# Altium PCB MachXO2FPGA.PcbDoc
Units mil, origin at the board's own origin, x right, y up, seen from the top; angles counter-clockwise.
Board outline 1950 x 850 mil, 4 copper layers (Top Layer, Layer 1, Layer 2, Bottom Layer), stack 61.811 mil thick; 38 components, 38 nets, 173 pads, 65 vias.
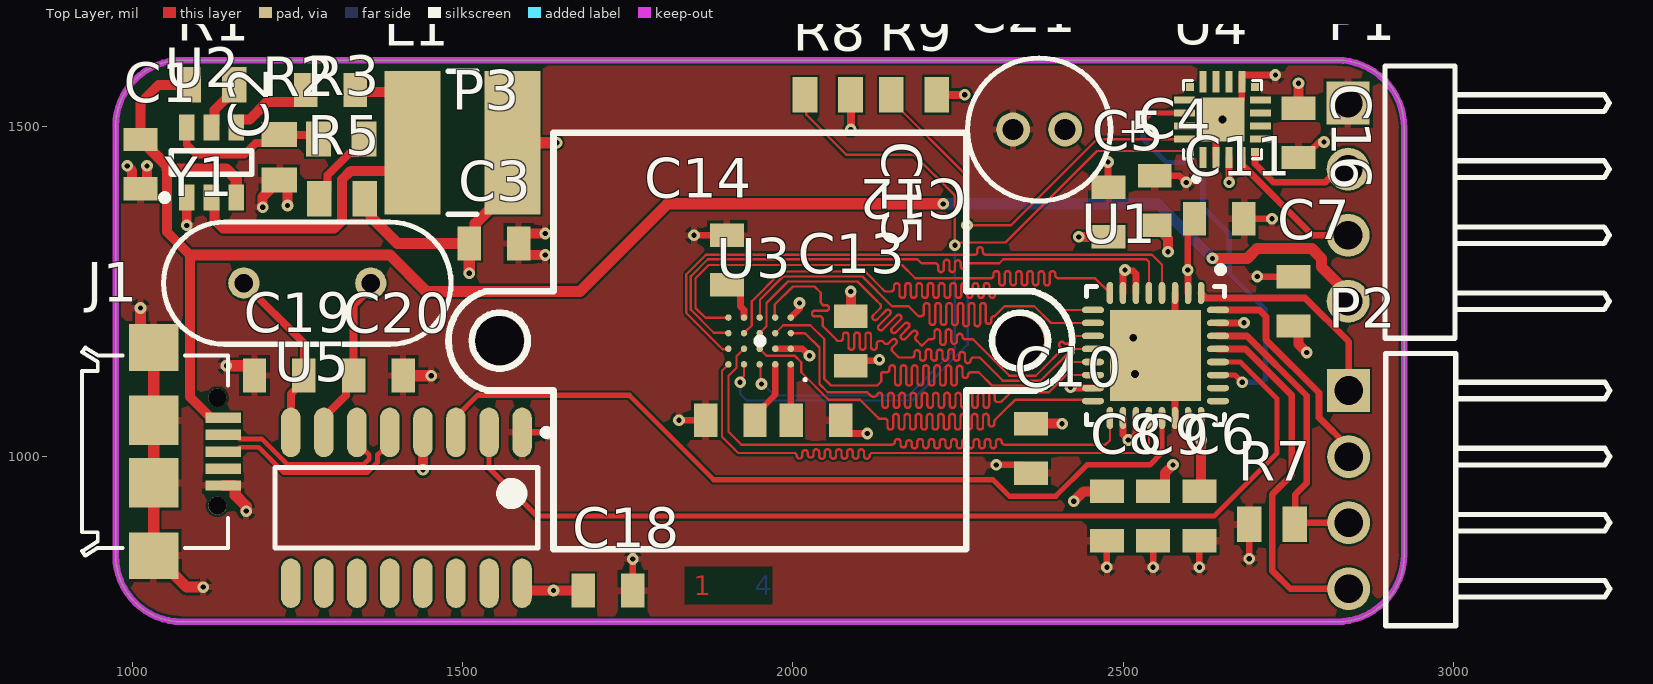
[diagram p0: Top Layer view]
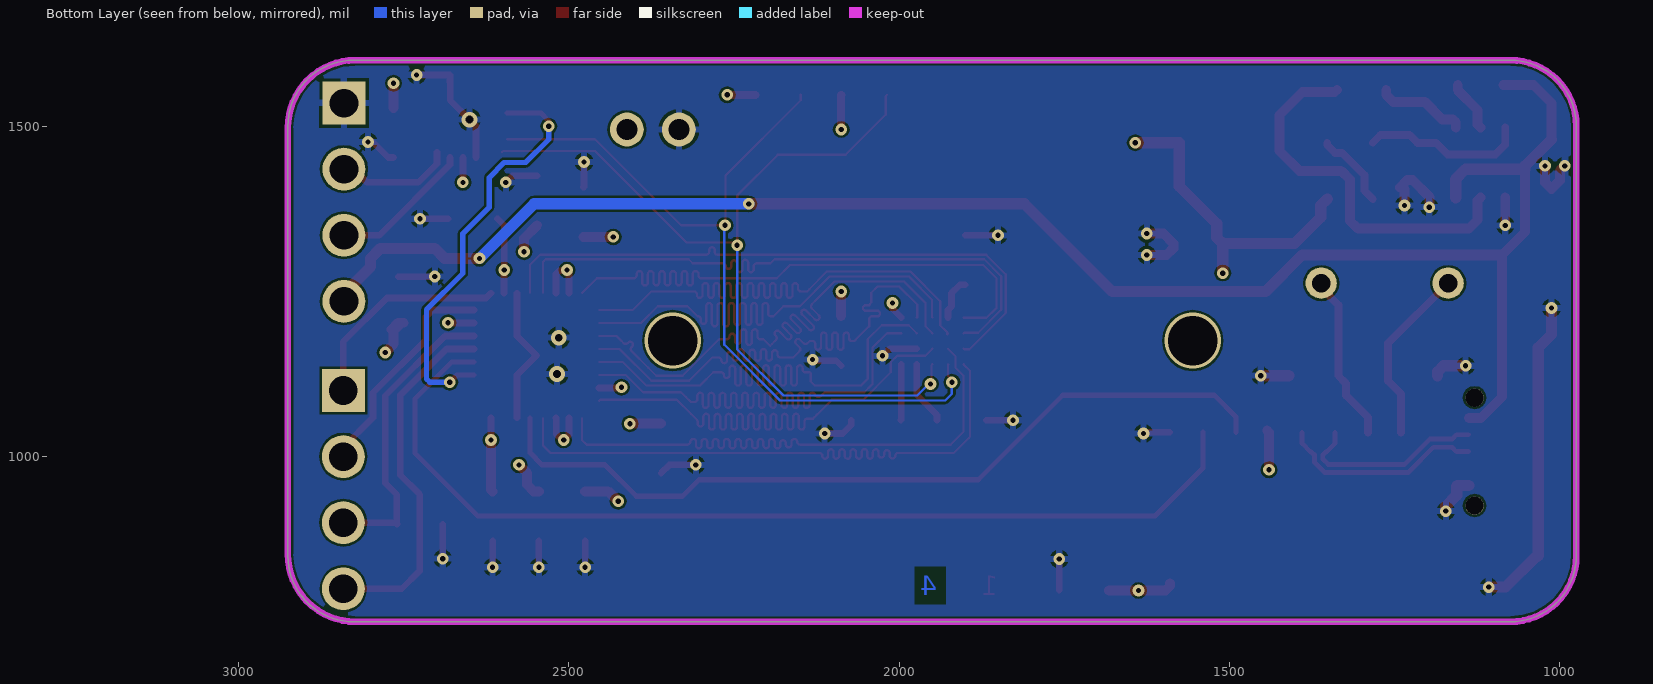
[diagram p1: Bottom Layer view, seen from below]
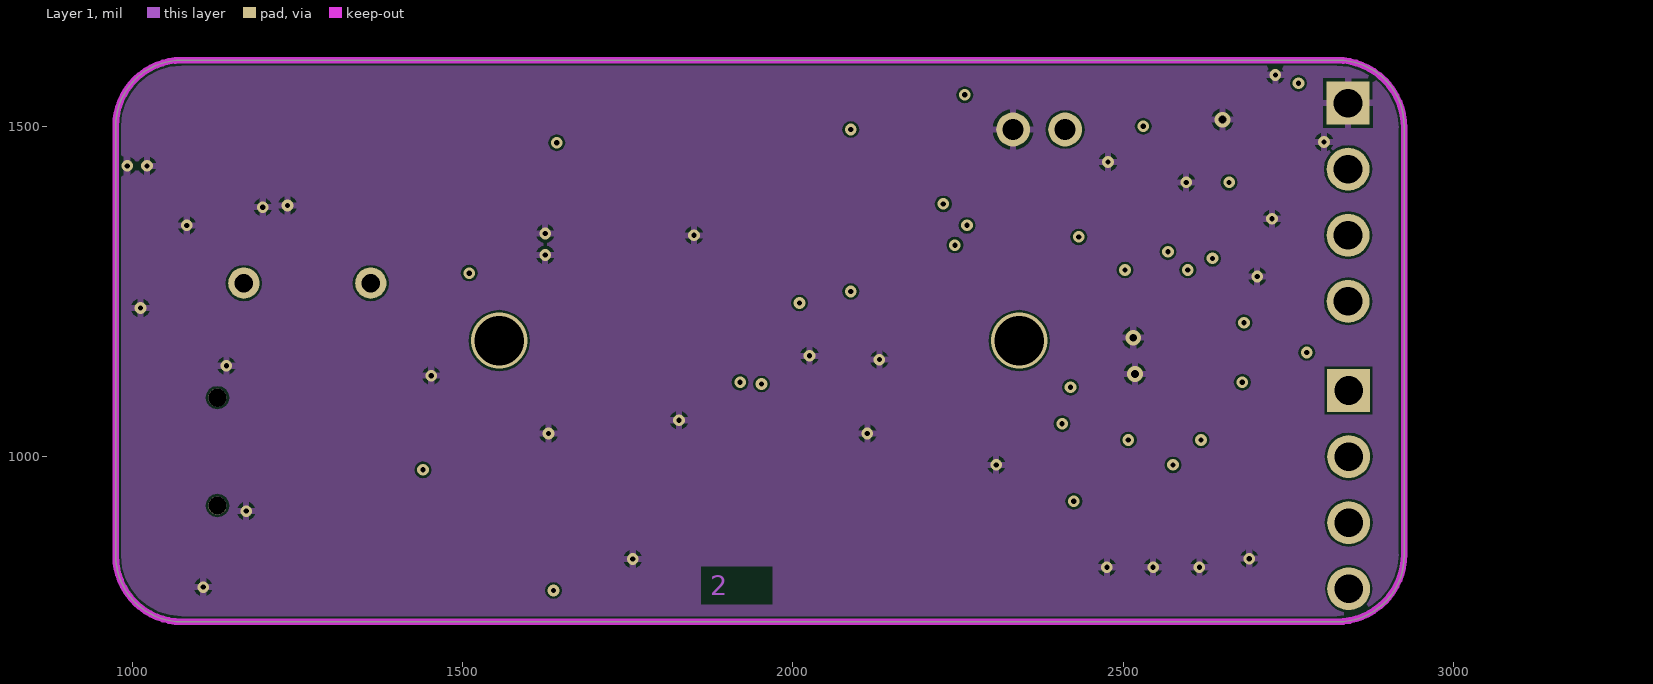
[diagram p2: Layer 1]
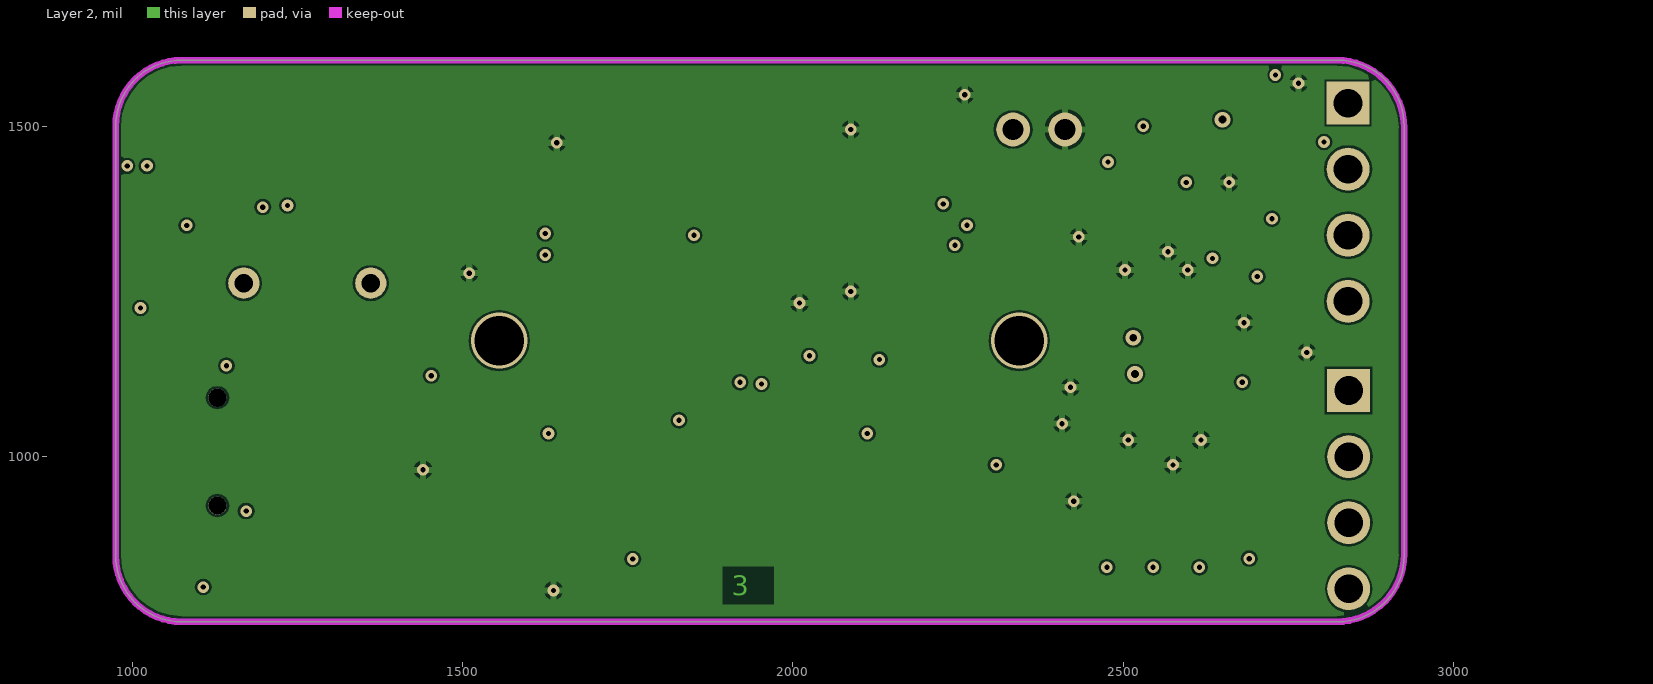
[diagram p3: Layer 2]
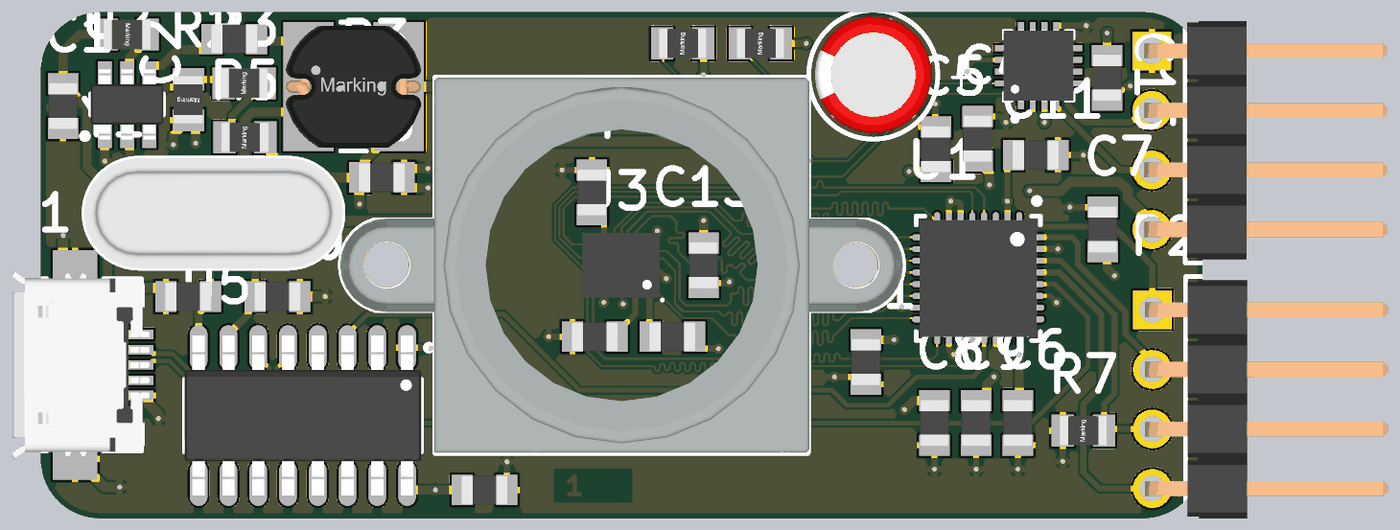
[diagram p4: 3D render of the assembled board from above, using the file's embedded part models]

## Layer stack, top to bottom
Top Solder: solder mask 1.378, Solder Resist, Dk 3.5
Top Layer: signal copper 1.378
Dielectric 2: prepreg 7.874, PP-006, Dk 4.6
Layer 1: signal copper 0.689
Dielectric 1: dielectric 41.9291, FR-4, Dk 4.8
Layer 2: signal copper 0.689
Dielectric 3: prepreg 7.874, PP-006, Dk 4.6
Bottom Layer: signal copper 1.378
Bottom Solder: solder mask 1.378, Solder Resist, Dk 3.5

## Board outline
2825,750 ccw(c2825,850) 2925,850 2925,1500 ccw(c2825,1500) 2825,1600 1075,1600 ccw(c1075,1500) 975,1500 975,850 ccw(c1075,850) 1075,750

## Design rules (kind name [scope] priority, off if disabled: settings)
Clearance [All] p1: gap=3.5 ignorepadtopadclearanceinfootprint=FALSE
DiffPairsRouting "Schematic Differential Pairs Routing_13" [InNetClass('USB')] p1: maxlimit=50 minlimit=3.5 mostfreqgap=5 toplayer_minwidth=3.5 toplayer_maxwidth=12 toplayer_prefwidth=7.35 midlayer1_minwidth=3.5 midlayer1_maxwidth=12 midlayer1_prefwidth=5.33 midlayer2_minwidth=3.5 midlayer2_maxwidth=12 midlayer2_prefwidth=5.33 bottomlayer_minwidth=3.5 bottomlayer_maxwidth=12 bottomlayer_prefwidth=7.35 impedanceprofiledriven=TRUE impedanceprofileid={5C0098F1-C063-4BAE-B721-2CA71FEA3CD5} impedanceprofilevalue=90.000000 maxuncoupledlength=500
DiffPairsRouting "Schematic Differential Pairs Routing" [InNetClass('IMG_SENS')] p2: maxlimit=50 minlimit=3.5 mostfreqgap=3.5 toplayer_minwidth=3.5 toplayer_maxwidth=12 toplayer_prefwidth=3.5 midlayer1_minwidth=3.5 midlayer1_maxwidth=12 midlayer1_prefwidth=3.5 midlayer2_minwidth=3.5 midlayer2_maxwidth=12 midlayer2_prefwidth=3.5 bottomlayer_minwidth=3.5 bottomlayer_maxwidth=12 bottomlayer_prefwidth=3.5 maxuncoupledlength=500
DiffPairsRouting "Schematic Differential Pairs Routing_12" [InNet('D3')] p3: maxlimit=50 minlimit=5 mostfreqgap=10 toplayer_prefgap=5 toplayer_minwidth=5 toplayer_maxwidth=12 toplayer_prefwidth=5 midlayer1_mingap=10 midlayer1_maxgap=10 midlayer1_minwidth=15 midlayer1_maxwidth=15 midlayer1_prefwidth=15 midlayer2_mingap=10 midlayer2_maxgap=10 midlayer2_minwidth=15 midlayer2_maxwidth=15 midlayer2_prefwidth=15 bottomlayer_prefgap=5 bottomlayer_minwidth=5 bottomlayer_maxwidth=12 bottomlayer_prefwidth=5 maxuncoupledlength=500
DiffPairsRouting "Schematic Differential Pairs Routing_11" [InNet('D0')] p4: maxlimit=50 minlimit=5 mostfreqgap=10 toplayer_prefgap=5 toplayer_minwidth=5 toplayer_maxwidth=12 toplayer_prefwidth=5 midlayer1_mingap=10 midlayer1_maxgap=10 midlayer1_minwidth=15 midlayer1_maxwidth=15 midlayer1_prefwidth=15 midlayer2_mingap=10 midlayer2_maxgap=10 midlayer2_minwidth=15 midlayer2_maxwidth=15 midlayer2_prefwidth=15 bottomlayer_prefgap=5 bottomlayer_minwidth=5 bottomlayer_maxwidth=12 bottomlayer_prefwidth=5 maxuncoupledlength=500
DiffPairsRouting "Schematic Differential Pairs Routing_10" [InNet('D5')] p5: maxlimit=50 minlimit=5 mostfreqgap=10 toplayer_prefgap=5 toplayer_minwidth=5 toplayer_maxwidth=12 toplayer_prefwidth=5 midlayer1_mingap=10 midlayer1_maxgap=10 midlayer1_minwidth=15 midlayer1_maxwidth=15 midlayer1_prefwidth=15 midlayer2_mingap=10 midlayer2_maxgap=10 midlayer2_minwidth=15 midlayer2_maxwidth=15 midlayer2_prefwidth=15 bottomlayer_prefgap=5 bottomlayer_minwidth=5 bottomlayer_maxwidth=12 bottomlayer_prefwidth=5 maxuncoupledlength=500
DiffPairsRouting "Schematic Differential Pairs Routing_9" [InNet('D2')] p6: maxlimit=50 minlimit=5 mostfreqgap=10 toplayer_prefgap=5 toplayer_minwidth=5 toplayer_maxwidth=12 toplayer_prefwidth=5 midlayer1_mingap=10 midlayer1_maxgap=10 midlayer1_minwidth=15 midlayer1_maxwidth=15 midlayer1_prefwidth=15 midlayer2_mingap=10 midlayer2_maxgap=10 midlayer2_minwidth=15 midlayer2_maxwidth=15 midlayer2_prefwidth=15 bottomlayer_prefgap=5 bottomlayer_minwidth=5 bottomlayer_maxwidth=12 bottomlayer_prefwidth=5 maxuncoupledlength=500
DiffPairsRouting [All] p7: maxlimit=10 minlimit=10 mostfreqgap=10 toplayer_minwidth=15 toplayer_maxwidth=15 toplayer_prefwidth=15 midlayer1_minwidth=15 midlayer1_maxwidth=15 midlayer1_prefwidth=15 midlayer2_minwidth=15 midlayer2_maxwidth=15 midlayer2_prefwidth=15 bottomlayer_minwidth=15 bottomlayer_maxwidth=15 bottomlayer_prefwidth=15 maxuncoupledlength=500
MatchedLengths USB [InNetClass('USB')] p1: tolerance=10 checknetsindiffpair=FALSE checkdiffpairvsdiffpair=TRUE checkxsignals=TRUE checkothers=TRUE
MatchedLengths IMG_SENS [InNetClass('IMG_SENS')] p2: tolerance=10 checknetsindiffpair=FALSE checkdiffpairvsdiffpair=TRUE checkxsignals=TRUE checkothers=TRUE
PlaneClearance [All] p1: clearance=3.5
PlaneConnect [All] p1: planeconnectstyle=Direct reliefexpansion=20 reliefentries=4 reliefconductorwidth=10 reliefairgap=10
PolygonConnect [All] p1: connectstyle=Relief reliefconductorwidth=10 reliefentries=4 polygonreliefangle="90 Angle" airgapwidth=5
RoutingVias [All] p1: holewidth=7.87 width=0.45 viastyle="Through Hole" minholewidth=7.87 minwidth=17.72 maxholewidth=196.85 maxwidth=393.7
SolderMaskExpansion [All] p1: expansion=4 istentingtop=FALSE
Width [All] p1: maxlimit=17 minlimit=3.5 preferedwidth=3.5
27 further rules are at their usual default settings.

## Classes and differential pairs
net class USB: D_N D_P
net class IMG_SENS: D0 D1 D2 D3 D4 D5 D6 D7 HSYNC IN_CLK PCLK VSYNC
differential pair D: +D_P -D_N

## Components (designator, comment, footprint, x,y, rotation, side; value= is the part's Value field where it differs from the comment)
C1 "22uF" WCAP-CSGP_0805_H=0.8mm_Reflow 1012.5,1442.5 r90 top
C2 "100nF" WCAP-CSGP_0805_H=0.8mm_Reflow 1300,1555 r180 top
C3 "22uF" WCAP-CSGP_0805_H=0.8mm_Reflow 1547.5,1322.5 r0 top
C4 "100nF" WCAP-CSGP_0805_H=0.8mm_Reflow 2547.5,1387.5 r90 top
C5 "100nF" WCAP-CSGP_0805_H=0.8mm_Reflow 2477.5,1370 r90 top
C6 "100nF" WCAP-CSGP_0805_H=0.8mm_Reflow 2615,910 r270 top
C7 "100nF" WCAP-CSGP_0805_H=0.8mm_Reflow 2757.5,1235 r90 top
C8 "100nF" WCAP-CSGP_0805_H=0.8mm_Reflow 2475,910 r270 top
C9 "100nF" WCAP-CSGP_0805_H=0.8mm_Reflow 2545,910 r270 top
C10 "100nF" WCAP-CSGP_0805_H=0.8mm_Reflow 2360,1012.4 r270 top
C11 "100nF" WCAP-CSGP_0805_H=0.8mm_Reflow 2645,1360 r0 top
C12 "100uF" WCAP-CSGP_0805_H=0.8mm_Reflow 2087.5,1175 r270 top
C13 "100uF" WCAP-CSGP_0805_H=0.8mm_Reflow 2035,1055 r0 top
C14 "100uF" WCAP-CSGP_0805_H=0.8mm_Reflow 1900,1297.5 r90 top
C15 "100uF" WCAP-CSGP_0805_H=0.8mm_Reflow 1905.1,1055 r180 top
C16 "100uF" WCAP-CSGP_0805_H=0.8mm_Reflow 2765,1490 r270 top
C18 "100nF" WCAP-CSGP_0805_H=0.8mm_Reflow 1720,797.5 r180 top
C19 "15pF" WCAP-CSGP_0805_H=0.6mm_Reflow 1222.5,1122.5 r0 top
C20 "15pF" WCAP-CSGP_0805_H=0.6mm_Reflow 1372.5,1122.5 r0 top
C21 "1uF, 50V" WCAP-ATG8_5x11 2372.5,1495 r0 top
J1 "Micro USB 2.0 Type B Receptacle" 629105136821 1032.5,1007.5 r270 top
L1 "3.3uH, CD54" WE-PD2_5848 1500,1475 r0 top
P1 "" 61300411021 2949.06,1385 r90 top
P2 "" 61300411021 2950,950 r90 top
P3 "M12 lens mount" PCBComponent_1 1950,1175 r180 top
R1 "100k" WRIS-PSMB_0805_H=0.22mm 1120,1562.5 r180 top
R2 "15k" WRIS-PSMB_0805_H=0.22mm 1222.77,1452.99 r90 top
R3 "36.5k" WRIS-PSMB_0805_H=0.22mm 1316.41,1480.57 r0 top
R5 "1k" WRIS-PSMB_0805_H=0.22mm 1317.5,1390 r0 top
R7 "4.7k" WRIS-PSMB_0805_H=0.22mm 2725,897.5 r0 top
R8 "4.7k" WRIS-PSMB_0805_H=0.22mm 2052.5,1547.5 r0 top
R9 "4.7k" WRIS-PSMB_0805_H=0.22mm 2183.05,1547.5 r0 top
U1 "MachXO2_1200HC_6SG32C" QFN50P500X500X65_HS-33N 2548.6,1153.01 r270 top
U2 "JW5033S" SOT95P280X110-6N 1120,1445 r90 top
U3 "GC0307" BGA20C60P5X4_329X276X78 1949.5,1175 r180 top
U4 "EFM8BB1x-QFN20" *QFN50P300X300X80-21N 2650,1510 r90 top
U5 "CH340G" CH340G 1415,922.5 r270 top
Y1 "12MHz" WE-XTAL_HC49/4H 1265,1262.5 r0 top

## Footprints (in the part's own frame and the unit in brackets; to place one, negate y for a bottom-side part, rotate by r counter-clockwise, add the part's x,y. Pads: shape width x height; smd on the part's side, far side on the other; paste and mask are expansions set on the pad)
61300411021 [mm] "Pin Header, pitch 2.54 mm, THT, Angled, single row, 4p"
  rect 1.65x1.65 hole 1.1: 1(3.81,2.77)
  round 1.65 hole 1.1: 2(1.27,2.77) 3(-1.27,2.77) 4(-3.81,2.77)
  silkscreen extent -5.23,-7.27 5.23,1.35, body extent -5.08,-7.27 5.08,3.09, height 2.58
629105136821 [mm] "Micro USB 2.0 SMT Type B Horizontal 5 Contacts"
  rect 0.4x1.35 smd: 1(-1.3,2.675) 2(-0.65,2.675) 3(0,2.675) 4(0.65,2.675) 5(1.3,2.675)
  round 0.7 hole 0.7 unplated: MH1(-2.075,2.45) MH2(2.075,2.45)
  rect 1.8x1.9 smd: S1(-4,0) S4(4,0)
  rect 1.9x1.9 smd: S2(-1.2,0) S3(1.2,0)
  silkscreen extent -4,-2.75 4,2.85, body extent -4,-2.73 4,3.17, height 2.69
*QFN50P300X300X80-21N [mm]
  rect 0.3x0.3 smd: 1(-1.25,1.25) 6(-1.25,-1.25) 11(1.25,-1.25) 16(1.25,1.25)
  rect 0.81x0.26 smd: 2(-1.455,0.75) 3(-1.455,0.25) 4(-1.455,-0.25) 5(-1.455,-0.75) 12(1.455,-0.75) 13(1.455,-0.25) 14(1.455,0.25) 15(1.455,0.75)
  rect 0.26x0.81 smd: 7(-0.75,-1.455) 8(-0.25,-1.455) 9(0.25,-1.455) 10(0.75,-1.455) 17(0.75,1.455) 18(0.25,1.455) 19(-0.25,1.455) 20(-0.75,1.455)
  rect 1.7x1.7 smd: 21(0,0)
  silkscreen extent -2.37,-1.5 1.5,1.5, body extent -1.52,-1.52 1.52,1.52, height 0.7
BGA20C60P5X4_329X276X78 [mm] "BGA, 20-Leads, Body 3,29x2,76mmx0,78mm, Pitch 0,60mm"
  round 0.25 smd: A1(-1.2,0.9) A2(-0.6,0.9) A3(0,0.9) A4(0.6,0.9) A5(1.2,0.9) B1(-1.2,0.3) B2(-0.6,0.3) B3(0,0.3) B4(0.6,0.3) B5(1.2,0.3) C1(-1.2,-0.3) C2(-0.6,-0.3) C3(0,-0.3) C4(0.6,-0.3) C5(1.2,-0.3) D1(-1.2,-0.9) D2(-0.6,-0.9) D3(0,-0.9) D4(0.6,-0.9) D5(1.2,-0.9)
  silkscreen extent -1.8,1.44 -1.7,1.53, body extent -1.65,-1.38 1.65,1.38, height 0.77
CH340G [mm] "TSOP, 16-Leads, Body 10,06x3,90mm, Pitch 1,27mm, IPC Medium Density"
  oval 1.9x0.75 smd: 1(-2.9,4.445) 2(-2.9,3.175) 3(-2.9,1.905) 4(-2.9,0.635) 5(-2.9,-0.635) 6(-2.9,-1.905) 7(-2.9,-3.175) 8(-2.9,-4.445) 9(2.9,-4.445) 10(2.9,-3.175) 11(2.9,-1.905) 12(2.9,-0.635) 13(2.9,0.635) 14(2.9,1.905) 15(2.9,3.175) 16(2.9,4.445)
  silkscreen extent -3.02,-5.05 1.55,5.5, body extent -3.41,-5.05 3.41,5.05, height 1.6
PCBComponent_1 [mil]
  silkscreen extent -473,-315 471,315, body extent -472,-315 472,315, height 583
QFN50P500X500X65_HS-33N [mm] "QFN, 32-Leads, Body 5,00x5,00mm, Pitch 0,50mm, Thermal Pad 3,50x3,50mm, IPC Medium Density"
  oval 0.85x0.25 smd: 1(-2.4,1.75) 2(-2.4,1.25) 3(-2.4,0.75) 4(-2.4,0.25) 5(-2.4,-0.25) 6(-2.4,-0.75) 7(-2.4,-1.25) 8(-2.4,-1.75) 17(2.4,-1.75) 18(2.4,-1.25) 19(2.4,-0.75) 20(2.4,-0.25) 21(2.4,0.25) 22(2.4,0.75) 23(2.4,1.25) 24(2.4,1.75)
  oval 0.25x0.85 smd: 9(-1.75,-2.4) 10(-1.25,-2.4) 11(-0.75,-2.4) 12(-0.25,-2.4) 13(0.25,-2.4) 14(0.75,-2.4) 15(1.25,-2.4) 16(1.75,-2.4) 25(1.75,2.4) 26(1.25,2.4) 27(0.75,2.4) 28(0.25,2.4) 29(-0.25,2.4) 30(-0.75,2.4) 31(-1.25,2.4) 32(-1.75,2.4)
  rect 3.5x3.5 smd: 33(0,0)
  silkscreen extent -3.42,-2.65 2.65,2.65, body extent -2.52,-2.52 2.52,2.52, height 0.65
SOT95P280X110-6N [mm] "SOT23, 6-Leads, Body 2,90x2,80mm, Pitch 0,95mm, IPC Medium Density"
  rect 1x0.6 smd: 1(-1.35,0.95) 2(-1.35,0) 3(-1.35,-0.95) 4(1.35,-0.95) 5(1.35,0) 6(1.35,0.95)
  silkscreen extent -1.47,-1.55 0.45,1.92, body extent -1.5,-1.55 1.5,1.55, height 1.1
WCAP-ATG8_5x11 [mm] "Aluminum Electrolytic Capacitors, 5x11mm"
  round 1.3 hole 0.8: 1(-1,0) 2(1,0)
  silkscreen extent -2.75,-2.75 2.75,2.75, body extent -2.49,-2.5 2.5,2.5, height 11.31
WCAP-CSGP_0805_H=0.6mm_Reflow [mm] "Ceramic Capacitors, body 2x1.25mm"
  rect 0.9x1.3 smd: 1(-0.95,0) 2(0.95,0)
  body extent -1,-0.62 1,0.63, height 0.6
WCAP-CSGP_0805_H=0.8mm_Reflow [mm] "Ceramic Capacitors, body 2x1.25mm"
  rect 0.9x1.3 smd: 1(-0.95,0) 2(0.95,0)
  body extent -1,-0.62 1,0.63, height 0.8
WE-PD2_5848 [mm] "SMD Power Inductor, 2-Leads, body 5.8x5.2mm"
  rect 2.15x5.5 smd: 1(-1.925,0) 2(1.925,0)
  silkscreen extent -0.55,-2.75 0.55,2.75, body extent -2.9,-2.6 2.89,2.6, height 4.48
WE-XTAL_HC49/4H [mm] "Quartz Crystal, size HC49/4H, body 11.05x4.7mm"
  round 1.2 hole 0.7: 1(-2.44,0) 2(2.44,0)
  silkscreen extent -5.52,-2.35 5.52,2.35, body extent -5.52,-2.35 5.53,2.35, height 4.15
WRIS-PSMB_0805_H=0.22mm [mm] "Metal Plate Resistor, SMT, body size 2x1.25mm"
  rect 0.95x1.36 smd: 1(-0.875,0) 2(0.875,0)
  body extent -1,-0.62 1,0.63, height 0.22

## Part data
C1 C3 C12 C13 C14 C15 C16: library part 885012207016, "WCAP-CSGP General Purpose Ceramic Capacitors, size 0805, 100nF, +/-10%, 10VDC", Capacitance=100nF, Capacitance Tolerance=+/-10%, Isolation Resistance=>=5GOhm, Operating Temperature="-55 to +125degC", Rated Voltage=10VDC, Ceramic Type=X7R, ComponentLink1Description=Manufacturer, ComponentLink1URL=http://www.we-online.de, ComponentLink2Description=Datasheet, ComponentLink2URL=https://katalog.we-online.com/pbs/datasheet/885012207016.pdf, Dissipation Factor=#NAME?, Height="0.8mm +/-0.10mm", Mounting Technology=SMD, Packaging="Tape and Reel", Part Number=885012207016, Published Date="August 2019", Publisher="Wurth Elektronik", Size=0805, Technical Reference=X7R0805104K010DFCT10000
C2 C4 C5 C6 C7 C8 C9 C10 C11 C18: library part 885012207016, "WCAP-CSGP General Purpose Ceramic Capacitors, size 0805, 100nF, +/-10%, 10VDC", Capacitance Tolerance=+/-10%, Isolation Resistance=>=5GOhm, Operating Temperature="-55 to +125degC", Rated Voltage=10VDC, Capacitance=100nF, Ceramic Type=X7R, ComponentLink1Description=Manufacturer, ComponentLink1URL=http://www.we-online.de, ComponentLink2Description=Datasheet, ComponentLink2URL=https://katalog.we-online.com/pbs/datasheet/885012207016.pdf, Dissipation Factor=#NAME?, Height="0.8mm +/-0.10mm", Mounting Technology=SMD, Packaging="Tape and Reel", Part Number=885012207016, Published Date="August 2019", Publisher="Wurth Elektronik", Size=0805, Technical Reference=X7R0805104K010DFCT10000
C19 C20: library part 885012007001, "WCAP-CSGP General Purpose Ceramic Capacitors, size 0805, 15pF, +/-5%, 10VDC", Capacitance Tolerance=+/-5%, Isolation Resistance=>=10GOhm, Operating Temperature="-55 to +125degC", Rated Voltage=10VDC, Capacitance=15pF, Ceramic Type=NP0, ComponentLink1Description=Manufacturer, ComponentLink1URL=http://www.we-online.de, ComponentLink2Description=Datasheet, ComponentLink2URL=https://katalog.we-online.com/pbs/datasheet/885012007001.pdf, Dissipation Factor=Q>=400+20C, Height="0.6mm +/-0.10mm", Mounting Technology=SMD, Packaging="Tape and Reel", Part Number=885012007001, Published Date="August 2019", Publisher="Wurth Elektronik", Size=0805, Technical Reference=NP00805150J010DFCT10000
C21: library part 860010672005, "WCAP-ATG8 THT Aluminum Electrolytic Capacitors, D5mm x L11mm, 1uF, +/-20%, 50VDC", Capacitance=1uF, Capacitance Tolerance=+/-20%, Leakage Current=3uA, Operating Temperature="-40 to +85degC", Rated Voltage=50VDC, Ripple Current max.=17mA, ComponentLink1Description=Manufacturer, ComponentLink1URL=http://www.we-online.de, ComponentLink2Description=Datasheet, ComponentLink2URL=https://katalog.we-online.com/pbs/datasheet/860010672005.pdf, Diameter=5mm, Dissipation Factor=10%, Endurance=2000h, Length=11mm, Mounting Technology=THT, Packaging="Ammo Pack", Part Number=860010672005, Published Date="August 2019", Publisher="Wurth Elektronik", Technical Reference=ATBC110010M050DSPA3B000
J1: library part 629105136821, "Micro USB 2.0 Type B, Receptacle, Horizontal, SMT", Operating Temperature="-40 to +105degC", Rated Current=1A, Working Voltage=30VAC, Application="Micro USB 2.0", ComponentLink1Description=Manufacturer, ComponentLink1URL=http://www.we-online.de, ComponentLink2Description=Datasheet, ComponentLink2URL=https://katalog.we-online.com/em/datasheet/629105136821.pdf, Gender=Receptacle, Interface Type="Type B", Mounting Technology=SMT, Packaging="Tape and Reel", Part Number=629105136821, Pin Number=5, Published Date="September 2019", Publisher="Wurth Elektronik", Type=Horizontal
L1: library part 744774022, "WE-PD2 SMT Power Inductor, size 5848, 2.2uH, 4.6A", DC Resistance max.=0.041Ohm, DC Resistance typ.=0.026Ohm, Inductance=2.2uH, Manufacturer="Wurth Elektronik", Operating Temperature="-40 to +125degC", Rated Current=4.6A, Saturation Current=8.2A, Self Resonant Frequency=54MHz, ComponentLink1Description=Manufacturer, ComponentLink1URL=http://www.we-online.de, ComponentLink2Description=Datasheet, ComponentLink2URL=https://www.we-online.com/catalog/datasheet/744774022.pdf, Manufacturer Part Number=744774022, Mounting Technology=SMT, Packaging="Tape and Reel", Published Date="April 2020", Size=5848
P1 P2: library part 61300411021, "WR-PHD Pin Header, THT, pitch 2.54mm, Single Row, Angled, 4p", Contact Resistance=20mOhm, Manufacturer="Wurth Elektronik", Operating Temperature="-40 to +105degC", Rated Current=3A, Withstanding Voltage=500VAC, Working Voltage=250VAC, ComponentLink1Description=Manufacturer, ComponentLink1URL=http://www.we-online.de, ComponentLink2Description=Datasheet, ComponentLink2URL=https://www.we-online.com/catalog/datasheet/61300411021.pdf, Gender="Pin Header", Manufacturer Part Number=61300411021, Mounting Technology=THT, Orientation=Angled, Packaging=Bag, Pin Number=4, Pitch=2.54mm, Published Date="May 2020", Row Number=Single
R1 R2 R3 R5 R7 R8 R9: library part 580060720008, "WRIS-PSMB Metal Plate Resistors, size 0805, 10mOhm, +/-1%, 0.5W", Operating Temperature="-55 to +155degC", Rated Current=7.07A, Rated Power=0.5W, Resistance=10mOhm, Resistance Tolerance=+/-1%, Temperature Coefficient of Resistance=+/-100ppm/degC, ComponentLink1Description=Manufacturer, ComponentLink1URL=http://www.we-online.de, ComponentLink2Description=Datasheet, ComponentLink2URL=https://katalog.we-online.com/pbs/datasheet/580060720008.pdf, Height=0.22mm, Length=2mm, Mounting Technology=SMT, Packaging="Tape and Reel", Part Number=580060720008, Published Date="September 2019", Publisher="Wurth Elektronik", Size=0805, Technical Reference=MB0805R010F102KAATP0000, Width=1.25mm
U2: "2A Step-Down Converter"
Y1: library part 830014948B, "WE-XTAL Quartz Crystal, size HC49 12MHz", Frequency=27.12MHz, Frequency Stability=50ppm, Frequency Tolerance=+/-30ppm, Load Capacitance=-, Operating Temperature="-10 up to +60degC", ComponentLink1Description=Manufacturer, ComponentLink1URL=http://www.we-online.de, ComponentLink2Description=Datasheet, ComponentLink2URL=https://katalog.we-online.com/pbs/datasheet/830014948B.pdf, Mounting Technology=THT, Packaging=Bulk, Part Number=830014948B, Published Date="March 2019", Publisher="Wurth Elektronik", Size=HC49-4H

## Via types
v1: diameter 17.72, hole 7.87, Top Layer to Bottom Layer, tented both sides, 60 vias
v2: diameter 23.62, hole 11.81, Top Layer to Bottom Layer, 3 vias
v3: diameter 85, hole 75, Top Layer to Bottom Layer, 2 vias

## Nets (pads, with @x,y where several pads share a name; then routed paths per layer and width w, separated by ;. In a path a pad name is that pad's centre, name@x,y a point inside that pad or via, vN(x,y) a via of type N, cw(c..) or ccw(c..) an arc to the next point about the centre after c; other vN are vias at no path point)
2V8: C3.1 C4.1 C5.1 C6.1 C7.1 C8.1 C9.1 C10.1 C11.1 C12.1 C16.1 C18.2 C21.2 L1.2 R5.2 R8.2 R9.2 U1.2 U1.6 U1.7 U1.15 U1.18 U1.19 U1.24 U1.31 U3.D1 U4.4 U5.4 U5.16 | length 1670.5
  Top Layer w10: U3.D1 2010,1223.69 v1(2010,1232.5) ; v1(2420,1105) 2421.12,1103.88 2454.04,1103.88 U1.15 ; U1.18 2499.39,1033.11 v1(2507.5,1025) 2509.59,1025 2517.09,1032.5 2517.5,1032.5 2519,1034 2519,1058.44 U1.19 ; U1.7 2499.39,1277.3 2503.11,1281.02 2514.69,1281.02 2519.07,1276.64 U1.6 ; U1.2 2597.82,1282.18 v1(2597.5,1282.5) 2597.5,1349.9 C11.1 ; v1(2617.5,1025) U1.24 ; U1.31 2682.22,1202.22 v1(2682.5,1202.5) ; U4.4 2659.84,1415.16 v1(2660,1415)
  Top Layer w12: R8.2 2087.5,1546.95 v1(2087.5,1495) ; R9.2 v1(2260,1547.5)
  Top Layer w15: v1(1440,980) U5.4 U5.4@1442.78,1039.45 ; U5.16 1590,804.21 1596.71,797.5 v1(1637.5,797.5) C18.2 ; C12.1 v1(2087.5,1250) ; C10.1 v1(2407.3,1049.8) ; v1(2425,932.5) 2440,947.5 2474.9,947.5 C8.1 ; v1(2432.5,1332.5) 2435,1332.5 2435.1,1332.6 C5.1 ; C9.1 2552.87,947.4 2563.09,957.62 2563.09,975.59 v1(2575,987.5) ; C4.1 2567.5,1330.1 v1(2567.5,1310) ; C6.1 2617.5,949.9 v1(2617.5,1025) ; C7.1@2750,1202.6 2757.87,1202.6 C7.1@2768.09,1192.38 ; C7.1 2765,1190.1 2765,1170 v1(2777.5,1157.5) ; C16.1 v1(2765,1565)
  Top Layer w17: R5.2 1361.91,1380.04 1361.91,1362.08 1401.49,1322.5 C3.1 ; v1(1510.1,1277.6) C3.1 ; v1(1642.5,1475) L1.2 1575.79,1409.06 1519.32,1352.58 1519.32,1331.72 C3.1
  Layer 2 w17: v1@1510,1277.5 v1(1510.1,1277.6)
  other v1: 2502.5,1282.5
5V: C1.2 J1.1 P1.4 R1.2 U2.3 | length 2676.3
  Top Layer w15: C1.2@1012.5,1480 1012.5,1535 1040,1562.5 R1.2 ; 1052.5,1435 1052.5,1340 1087.5,1305 1087.5,1090.3 1119.11,1058.68 J1.1
  Top Layer w17: C1.2@1012.5,1480 1052.5,1440 ; 1052.5,1435 1142.5,1435 1157.4,1420.1 U2.3 ; 1087.5,1305 1390,1305 1445,1250 1677.5,1250 1810,1382.5 v1(2227.5,1382.5) ; v1(2635,1300) 2687.5,1300 2702.5,1315 2785,1315 2800,1300 2800,1287 2840,1247 P1.4
  Bottom Layer w17: v1(2227.5,1382.5) 2552.5,1382.5 v1(2635,1300)
C2CK: P1.3 U4.5 | length 215.6
  Top Layer w10: U4.5 2679.53,1441.89 2786.42,1335 P1.3
C2D: P1.2 U4.6 | length 178.3
  Top Layer w10: U4.6 2699.21,1443.29 2727.5,1415 2805.13,1415 2825.13,1435 P1.2
D0: U1.13 U3.C2 | length 947.9
  Top Layer w3.5: U3.C2 1985.25,1198.94 2026.06,1198.94 2047.5,1177.5 2047.5,1117.5 2057.5,1107.5 2127.5,1107.5 2133.56,1113.56 2133.56,1126.06 2135,1127.5 2139.9,1127.5 2141.66,1127.5 ccw(c2141.66,1131.75) 2145.91,1131.75 2145.91,1133.94 cw(c2150.16,1133.94) 2150.16,1138.19 cw(c2150.16,1133.94) 2154.41,1133.94 2154.41,1111.75 ccw(c2158.66,1111.75) 2158.66,1107.5 ccw(c2158.66,1111.75) 2162.92,1111.75 2162.92,1133.94 cw(c2167.17,1133.94) 2167.17,1138.19 cw(c2167.17,1133.94) 2171.42,1133.94 2171.42,1111.75 ccw(c2175.67,1111.75) 2175.67,1107.5 ccw(c2175.67,1111.75) 2179.92,1111.75 2179.92,1133.94 cw(c2184.18,1133.94) 2184.18,1138.19 cw(c2184.18,1133.94) 2188.43,1133.94 2188.43,1111.75 ccw(c2192.68,1111.75) 2192.68,1107.5 ccw(c2192.68,1111.75) 2196.93,1111.75 2196.93,1133.87 cw(c2201.18,1133.87) 2201.18,1138.12 cw(c2201.18,1133.87) 2205.43,1133.87 2205.43,1111.75 ccw(c2209.69,1111.75) 2209.69,1107.5 ccw(c2209.69,1111.75) 2213.94,1111.75 2213.94,1133.87 cw(c2218.19,1133.87) 2218.19,1138.12 cw(c2218.19,1133.87) 2222.44,1133.87 2222.44,1111.75 ccw(c2226.69,1111.75) 2226.69,1107.5 ccw(c2226.69,1111.75) 2230.95,1111.75 2230.95,1133.87 cw(c2235.2,1133.87) 2235.2,1138.12 cw(c2235.2,1133.87) 2239.45,1133.87 2239.45,1111.75 ccw(c2243.7,1111.75) 2243.7,1107.5 ccw(c2243.7,1111.75) 2247.95,1111.75 2247.95,1133.25 cw(c2252.21,1133.25) 2252.21,1137.5 cw(c2252.21,1133.25) 2256.46,1133.25 2256.46,1123.25 ccw(c2260.71,1123.25) 2260.71,1119 ccw(c2260.71,1123.25) 2264.96,1123.25 cw(c2269.21,1123.25) 2269.21,1127.5 2276.35,1127.5 2281.25,1127.5 2301.25,1107.5 2382.5,1107.5 2418.17,1143.17 U1.13
D1: U1.12 U3.D2 | length 948.1
  Top Layer w3.5: U3.D2 1972.5,1211.06 1972.5,1230 2000,1257.5 2032.5,1257.5 2041.88,1248.12 2041.88,1233.12 2043.63,1231.37 2043.73,1231.26 cw(c2038.31,1226.43) 2044.99,1229.26 2048.73,1229.24 2050.33,1229.24 cw(c2050.33,1224.99) 2054.58,1224.99 cw(c2050.33,1224.99) 2050.33,1220.74 2032.91,1220.74 ccw(c2032.91,1216.49) 2028.65,1216.49 ccw(c2032.91,1216.49) 2032.91,1212.24 2040.75,1212.24 cw(c2040.75,1207.98) 2045,1207.98 2045,1199.5 2045,1197.5 2063.14,1179.36 2067.5,1175 2071.34,1175 ccw(c2071.34,1179.25) 2075.59,1179.25 2075.59,1183.57 cw(c2079.84,1183.57) 2079.84,1187.82 cw(c2079.84,1183.57) 2084.09,1183.57 2084.09,1165.9 ccw(c2088.35,1165.9) 2088.35,1161.65 ccw(c2088.35,1165.9) 2092.6,1165.9 2092.6,1183.57 cw(c2096.85,1183.57) 2096.85,1187.82 cw(c2096.85,1183.57) 2101.1,1183.57 2101.1,1165.9 ccw(c2105.35,1165.9) 2105.35,1161.65 ccw(c2105.35,1165.9) 2109.61,1165.9 2109.61,1183.57 cw(c2113.86,1183.57) 2113.86,1187.82 cw(c2113.86,1183.57) 2118.11,1183.57 2118.11,1165.9 ccw(c2122.36,1165.9) 2122.36,1161.65 ccw(c2122.36,1165.9) 2126.61,1165.9 2126.61,1170.75 cw(c2130.87,1170.75) 2130.87,1175 2135,1175 2136.87,1173.13 2137.23,1172.77 2138.47,1171.53 ccw(c2141.48,1174.53) 2144.49,1171.53 2149.84,1176.88 cw(c2152.85,1173.87) 2155.86,1176.88 cw(c2152.85,1173.87) 2155.86,1170.87 2150.5,1165.51 ccw(c2153.51,1162.51) 2150.5,1159.5 2159.99,1150.01 2177.77,1150 2179.52,1150 ccw(c2179.52,1154.25) 2183.77,1154.25 2183.77,1156.8 cw(c2188.02,1156.8) 2188.02,1161.05 cw(c2188.02,1156.8) 2192.28,1156.8 2192.28,1149.38 ccw(c2196.53,1149.38) 2196.53,1145.13 ccw(c2196.53,1149.38) 2200.78,1149.38 2200.78,1158.48 cw(c2205.03,1158.48) 2205.03,1162.74 cw(c2205.03,1158.48) 2209.28,1158.48 2209.28,1149.38 ccw(c2213.54,1149.38) 2213.54,1145.13 ccw(c2213.54,1149.38) 2217.79,1149.38 2217.79,1157.71 cw(c2222.04,1157.71) 2222.04,1161.96 cw(c2222.04,1157.71) 2226.29,1157.71 2226.29,1149.38 ccw(c2230.54,1149.38) 2230.54,1145.13 ccw(c2230.54,1149.38) 2234.8,1149.38 2234.8,1158.48 cw(c2239.05,1158.48) 2239.05,1162.74 cw(c2239.05,1158.48) 2243.3,1158.48 2243.3,1149.38 ccw(c2247.55,1149.38) 2247.55,1145.13 ccw(c2247.55,1149.38) 2251.8,1149.38 2251.8,1154.17 cw(c2256.06,1154.17) 2256.06,1158.42 cw(c2256.06,1154.17) 2260.31,1154.17 2260.31,1145.75 ccw(c2264.56,1145.75) 2264.56,1141.5 ccw(c2264.56,1145.75) 2268.81,1145.75 cw(c2273.06,1145.75) 2273.06,1150 2282.5,1150 2302.67,1129.83 2317.5,1115 2375,1115 2422.85,1162.85 U1.12
D2: U1.10 U3.D3 | length 944.9
  Top Layer w3.5: U3.D3 1950,1210.93 1950,1237.5 1985,1272.5 2105,1272.5 2150,1227.5 2175,1227.5 2190,1212.5 2192.12,1212.5 2193.87,1212.5 ccw(c2193.87,1216.75) 2198.12,1216.75 2198.12,1228.25 cw(c2202.37,1228.25) 2202.37,1232.5 cw(c2202.37,1228.25) 2206.62,1228.25 2206.62,1203.55 ccw(c2210.88,1203.55) 2210.88,1199.3 ccw(c2210.88,1203.55) 2215.13,1203.55 2215.13,1228.25 cw(c2219.38,1228.25) 2219.38,1232.5 cw(c2219.38,1228.25) 2223.63,1228.25 2223.63,1203.55 ccw(c2227.88,1203.55) 2227.88,1199.3 ccw(c2227.88,1203.55) 2232.14,1203.55 2232.14,1228.25 cw(c2236.39,1228.25) 2236.39,1232.5 cw(c2236.39,1228.25) 2240.64,1228.25 2240.64,1202.91 ccw(c2244.89,1202.91) 2244.89,1198.66 ccw(c2244.89,1202.91) 2249.14,1202.91 2249.14,1228.25 cw(c2253.39,1228.25) 2253.39,1232.5 cw(c2253.39,1228.25) 2257.65,1228.25 2257.65,1201.55 ccw(c2261.9,1201.55) 2261.9,1197.29 ccw(c2261.9,1201.55) 2266.15,1201.55 2266.15,1228.25 cw(c2270.4,1228.25) 2270.4,1232.5 cw(c2270.4,1228.25) 2274.65,1228.25 2274.65,1201.55 ccw(c2278.91,1201.55) 2278.91,1197.29 ccw(c2278.91,1201.55) 2283.16,1201.55 2283.16,1228.25 cw(c2287.41,1228.25) 2287.41,1232.5 cw(c2287.41,1228.25) 2291.66,1228.25 2291.66,1204.95 ccw(c2295.91,1204.95) 2295.91,1200.7 ccw(c2295.91,1204.95) 2300.17,1204.95 2300.17,1208.25 cw(c2304.42,1208.25) 2304.42,1212.5 2305,1212.5 2310.48,1217.98 2320,1227.5 2365,1227.5 2390.28,1202.22 U1.10
D3: U1.11 U3.C3 | length 947.9
  Top Layer w3.5: U3.C3 1960,1197.31 1960,1232.5 1992.5,1265 2097.5,1265 2124.75,1237.75 2132,1230.5 cw(c2128.99,1227.49) 2132,1224.49 2121.35,1213.84 ccw(c2124.36,1210.83) 2121.35,1207.82 ccw(c2124.36,1210.83) 2127.36,1207.82 2140.56,1221.02 cw(c2143.57,1218.01) 2146.57,1221.02 cw(c2143.57,1218.01) 2146.57,1215.01 2129.85,1198.29 ccw(c2132.86,1195.28) 2129.85,1192.27 ccw(c2132.86,1195.28) 2135.87,1192.27 2156.96,1213.36 cw(c2159.96,1210.36) 2162.97,1213.36 cw(c2159.96,1210.36) 2162.97,1207.35 2149.77,1194.15 ccw(c2152.78,1191.14) 2149.77,1188.14 ccw(c2152.78,1191.14) 2155.78,1188.14 2168.98,1201.34 cw(c2171.99,1198.33) 2175,1201.34 cw(c2171.99,1198.33) 2175,1195.32 2164.16,1184.49 ccw(c2167.17,1181.48) 2164.16,1178.48 ccw(c2167.17,1181.48) 2170.18,1178.48 2181.01,1189.31 cw(c2184.02,1186.3) 2187.02,1189.31 cw(c2184.02,1186.3) 2187.02,1183.3 2186.12,1182.39 ccw(c2189.13,1179.39) 2186.12,1176.38 2192.57,1169.93 2195,1167.5 2205,1177.5 2208.12,1177.5 2209.88,1177.5 ccw(c2209.88,1181.75) 2214.13,1181.75 2214.13,1188.33 cw(c2218.38,1188.33) 2218.38,1192.59 cw(c2218.38,1188.33) 2222.63,1188.33 2222.63,1173.22 ccw(c2226.89,1173.22) 2226.89,1168.97 ccw(c2226.89,1173.22) 2231.14,1173.22 2231.14,1188.33 cw(c2235.39,1188.33) 2235.39,1192.59 cw(c2235.39,1188.33) 2239.64,1188.33 2239.64,1175.04 ccw(c2243.89,1175.04) 2243.89,1170.79 ccw(c2243.89,1175.04) 2248.14,1175.04 2248.14,1181.75 cw(c2252.4,1181.75) 2252.4,1186 cw(c2252.4,1181.75) 2256.65,1181.75 ccw(c2260.9,1181.75) 2260.9,1177.5 2271.89,1177.5 2272.5,1177.5 2327.5,1122.5 2367.5,1122.5 2379.38,1134.38 2404.67,1159.67 ccw(c2401.66,1162.67) 2404.67,1165.68 2403.86,1166.49 cw(c2406.87,1169.49) 2403.86,1172.5 cw(c2406.87,1169.49) 2409.87,1172.5 2410.68,1171.69 ccw(c2413.69,1174.7) 2416.69,1171.69 2422.14,1177.14 2427.54,1182.54 U1.11
D4: U1.9 U3.C4 | length 949.9
  Top Layer w3.5: U3.C4 1925.88,1186.62 1927.5,1185 1927.5,1188.43 1937.5,1198.43 1937.5,1234.9 1982.6,1280 2109.2,1280 2136,1253.2 2139.2,1250 2148.52,1250 ccw(c2148.52,1254.25) 2152.77,1254.25 2152.77,1258.33 cw(c2157.03,1258.33) 2157.03,1262.58 cw(c2157.03,1258.33) 2161.28,1258.33 2161.28,1244.43 ccw(c2165.53,1244.43) 2165.53,1240.17 ccw(c2165.53,1244.43) 2169.78,1244.43 2169.78,1258.33 cw(c2174.03,1258.33) 2174.03,1262.58 cw(c2174.03,1258.33) 2178.28,1258.33 2178.28,1244.43 ccw(c2182.54,1244.43) 2182.54,1240.17 ccw(c2182.54,1244.43) 2186.79,1244.43 2186.79,1258.33 cw(c2191.04,1258.33) 2191.04,1262.58 cw(c2191.04,1258.33) 2195.29,1258.33 2195.29,1244.43 ccw(c2199.54,1244.43) 2199.54,1240.17 ccw(c2199.54,1244.43) 2203.8,1244.43 2203.8,1258.33 cw(c2208.05,1258.33) 2208.05,1262.58 cw(c2208.05,1258.33) 2212.3,1258.33 2212.3,1244.43 ccw(c2216.55,1244.43) 2216.55,1240.17 ccw(c2216.55,1244.43) 2220.8,1244.43 2220.8,1258.33 cw(c2225.06,1258.33) 2225.06,1262.58 cw(c2225.06,1258.33) 2229.31,1258.33 2229.31,1244.43 ccw(c2233.56,1244.43) 2233.56,1240.17 ccw(c2233.56,1244.43) 2237.81,1244.43 2237.81,1258.33 cw(c2242.06,1258.33) 2242.06,1262.58 cw(c2242.06,1258.33) 2246.32,1258.33 2246.32,1244.43 ccw(c2250.57,1244.43) 2250.57,1240.17 ccw(c2250.57,1244.43) 2254.82,1244.43 2254.82,1258.33 cw(c2259.07,1258.33) 2259.07,1262.58 cw(c2259.07,1258.33) 2263.32,1258.33 2263.32,1244.43 ccw(c2267.58,1244.43) 2267.58,1240.17 ccw(c2267.58,1244.43) 2271.83,1244.43 2271.83,1258.33 cw(c2276.08,1258.33) 2276.08,1262.58 cw(c2276.08,1258.33) 2280.33,1258.33 2280.33,1244.43 ccw(c2284.58,1244.43) 2284.58,1240.17 ccw(c2284.58,1244.43) 2288.84,1244.43 2288.84,1258.33 cw(c2293.09,1258.33) 2293.09,1262.58 cw(c2293.09,1258.33) 2297.34,1258.33 2297.34,1244.43 ccw(c2301.59,1244.43) 2301.59,1240.17 ccw(c2301.59,1244.43) 2305.84,1244.43 2305.84,1245.75 cw(c2310.1,1245.75) 2310.1,1250 2311.85,1250 2375,1250 2403.09,1221.91 U1.9
D5: U1.4 U3.B5 | length 942.1
  Top Layer w3.5: U3.B5 1901.57,1162.5 1893.51,1162.5 1838.5,1217.51 1838.5,1275.8 1868.21,1305.51 2272.89,1305.51 2274.64,1305.51 ccw(c2274.64,1309.76) 2278.89,1309.76 2278.89,1312.77 cw(c2283.14,1312.77) 2283.14,1317.02 cw(c2283.14,1312.77) 2287.39,1312.77 2287.39,1309.76 ccw(c2291.65,1309.76) 2291.65,1305.51 2312.5,1305.51 2543.15,1305.51 2558.44,1290.22 U1.4
D6: U1.17 U3.B4 | length 947.9
  Top Layer w3.5: U3.B4 1914.43,1151.74 1914.43,1134.43 1902.5,1122.5 1902.5,1037.5 1921.87,1018.13 2123.46,1018.13 2149.97,1018.13 ccw(c2149.97,1022.39) 2154.22,1022.39 cw(c2158.47,1022.39) 2158.47,1026.64 cw(c2158.47,1022.39) 2162.72,1022.39 2162.72,1018.13 ccw(c2166.98,1018.13) 2166.98,1013.88 ccw(c2166.98,1018.13) 2171.23,1018.13 2171.23,1020.35 cw(c2175.48,1020.35) 2175.48,1024.6 cw(c2175.48,1020.35) 2179.73,1020.35 2179.73,1016.82 ccw(c2183.98,1016.82) 2183.98,1012.57 ccw(c2183.98,1016.82) 2188.24,1016.82 2188.24,1022.4 cw(c2192.49,1022.4) 2192.49,1026.65 cw(c2192.49,1022.4) 2196.74,1022.4 2196.74,1016.82 ccw(c2200.99,1016.82) 2200.99,1012.57 ccw(c2200.99,1016.82) 2205.24,1016.82 2205.24,1022.4 cw(c2209.5,1022.4) 2209.5,1026.65 cw(c2209.5,1022.4) 2213.75,1022.4 2213.75,1016.82 ccw(c2218,1016.82) 2218,1012.57 ccw(c2218,1016.82) 2222.25,1016.82 2222.25,1022.4 cw(c2226.5,1022.4) 2226.5,1026.65 cw(c2226.5,1022.4) 2230.76,1022.4 2230.76,1016.82 ccw(c2235.01,1016.82) 2235.01,1012.57 ccw(c2235.01,1016.82) 2239.26,1016.82 2239.26,1022.4 cw(c2243.51,1022.4) 2243.51,1026.65 cw(c2243.51,1022.4) 2247.76,1022.4 2247.76,1016.82 ccw(c2252.01,1016.82) 2252.01,1012.57 ccw(c2252.01,1016.82) 2256.27,1016.82 2256.27,1022.4 cw(c2260.52,1022.4) 2260.52,1026.65 cw(c2260.52,1022.4) 2264.77,1022.4 2264.77,1016.82 ccw(c2269.02,1016.82) 2269.02,1012.57 ccw(c2269.02,1016.82) 2273.27,1016.82 2273.27,1022.4 cw(c2277.53,1022.4) 2277.53,1026.65 cw(c2277.53,1022.4) 2281.78,1022.4 2281.78,1016.82 ccw(c2286.03,1016.82) 2286.03,1012.57 ccw(c2286.03,1016.82) 2290.28,1016.82 2290.28,1022.4 cw(c2294.53,1022.4) 2294.53,1026.65 cw(c2294.53,1022.4) 2298.79,1022.4 2298.79,1016.82 ccw(c2303.04,1016.82) 2303.04,1012.57 ccw(c2303.04,1016.82) 2307.29,1016.82 2307.29,1022.4 cw(c2311.54,1022.4) 2311.54,1026.65 cw(c2311.54,1022.4) 2315.79,1022.4 ccw(c2320.05,1022.39) 2320.05,1018.13 2330.3,1018.13 2473.07,1018.13 2479.7,1024.77 U1.17
D7: U1.20 U3.A5 | length 948.1
  Top Layer w3.5: U3.A5@1902.4,1139.42 U3.A5 1892.5,1129.81 1892.5,1030 1895,1027.5 1895.16,1027.5 1917.1,1005.57 1988.64,1005.57 2001.3,1005.57 cw(c2001.3,1001.32) 2005.55,1001.32 ccw(c2009.8,1001.31) 2014.05,1001.31 2014.05,1005.57 cw(c2018.3,1005.57) 2022.55,1005.57 2022.55,1002.8 ccw(c2026.8,1002.8) 2031.05,1002.8 2031.05,1006.88 cw(c2035.3,1006.88) 2039.55,1006.88 2039.55,1001.08 ccw(c2043.8,1001.08) 2048.05,1001.08 2048.05,1006.88 cw(c2052.3,1006.88) 2056.55,1006.88 2056.55,1001.08 ccw(c2060.8,1001.08) 2065.05,1001.08 2065.05,1006.88 cw(c2069.3,1006.88) 2073.55,1006.88 2073.55,1001.08 ccw(c2077.8,1001.08) 2082.05,1001.08 2082.05,1006.88 cw(c2086.3,1006.88) 2090.55,1006.88 2090.55,1001.08 ccw(c2094.8,1001.08) 2099.05,1001.08 2099.05,1006.88 cw(c2103.3,1006.88) 2107.55,1006.88 2107.55,1001.08 ccw(c2111.8,1001.08) 2116.05,1001.08 2116.05,1001.32 cw(c2120.3,1001.32) 2120.3,1005.57 2122.05,1005.57 2527.5,1005.57 2538.76,1016.83 U1.20
D_N: J1.2 U5.6 | length 291.8
  Top Layer w7.35: J1.2 1156.52,1033.09 1163.14,1026.47 1196.54,1026.47 1234.76,988.25 1350.68,988.25 1358.83,996.4 1358.83,1002.49 1354.52,1006.79 1353.25,1006.79 1340,1020.04 U5.6
D_P: J1.3 U5.5 | length 312.2
  Top Layer w7.35: J1.3 1156.52,1007.5 1163.14,1014.12 1191.43,1014.12 1229.65,975.91 1355.79,975.91 1371.17,991.29 1371.17,1002.49 1375.48,1006.79 1376.75,1006.79 1390,1020.04 U5.5
GND: C1.1 C3.2 C4.2 C5.2 C6.2 C7.2 C8.2 C9.2 C10.2 C11.2 C12.2 C13.2 C14.2 C15.2 C16.2 C18.1 C19.1 C20.2 C21.1 J1.5 J1.S1 J1.S2 J1.S3 J1.S4 P1.1 R2.1 R7.1 U1.3 U1.22 U1.33 U2.1 U3.B1 U3.B2 U4.3 U4.12 U4.21 U5.1 | length 2167.8
  Top Layer w10: U5.1 1628.33,1036.67 v1(1630,1035) ; C18.1 1757.4,844.9 v1(1757.5,845) ; v1(1827.5,1055) C15.2 ; v1(1850.1,1334.9) C14.2 ; U3.B2 U3.B1 2014.31,1163.19 v1(2025,1152.5) ; C13.2 2072.4,1047.72 2085.12,1035 v1(2112.5,1035) ; C12.2 2094.9,1145 2125,1145 2125.27,1145.27 2129.25,1145.27 v1(2130.72,1146.75) ; v1(2307.5,987.5) 2347.5,987.5 C10.2 ; v1(2475,832.5) C8.2 ; v1(2476.69,1445.89) 2476.69,1408.21 C5.2 ; v1(2545,832.5) C9.2 ; C4.2 2585.1,1424.9 v1(2595,1415) ; U1.22 2578.13,1123.48 U1.33 2578.13,1182.54 U1.3 ; v1(2615,832.5) C6.2 ; U4.3 2640.16,1500.16 v2(2650,1510) 2679.41,1539.41 2679.41,1567.17 U4.12 2679.53,1577.38 2679.65,1577.5 v1(2730,1577.5) ; C11.2 v1(2725,1360) ; v1(2690.55,845.55) R7.1 ; v1(2702.5,1272.5) 2702.6,1272.4 C7.2 ; C16.2 2772.87,1452.6 2796.39,1476.11 v1(2803.61,1476.11)
  Top Layer w15: v1(992.5,1440) 1000,1432.5 1000,1417.6 C1.1 1022.5,1415.1 v1(1022.5,1440) ; v1(1082.6,1349.9) U2.1 ; v1(1197.5,1377.5) 1197.5,1393.27 R2.1 1230.84,1418.54 R2.1@1242.04,1407.34 ; v1(1235,1380) R2.1@1235,1405 ; v1(1625,1305) 1595.12,1305 1584.9,1315.22 C3.2 1599.9,1337.5 v1(1625,1337.5)
  Top Layer w17: v1(1012.5,1225) 1012.5,1184.98 J1.S1 J1.S2 J1.S3 J1.S4 1034.47,850.02 1081.99,802.5 v1(1107.5,802.5) ; J1.5 1155.26,956.32 1155.89,955.69 1155.89,941.61 1172.5,925 v1(1172.5,917.5) ; v1(1142.5,1137.5) 1175.88,1137.5 1185.1,1128.28 C19.1 ; C20.2 v1(1452.5,1122.5)
  Layer 1 w10: v1(2130.72,1146.75) v1@2134.25,1146.75
  other v2: 2517.5,1125 2515,1180
HSYNC: U1.16 U3.B3 | length 948.6
  Top Layer w3.5: U3.B3 1960.23,1152.46 2002.99,1152.46 2012.5,1142.95 2012.5,1127.6 2054.26,1085.84 2101.66,1085.84 2124.38,1063.12 2130,1057.5 2138.89,1057.5 cw(c2138.89,1053.25) 2143.14,1053.25 2143.14,1045.17 ccw(c2147.39,1045.17) 2151.64,1045.17 2151.64,1060.43 cw(c2155.89,1060.43) 2160.14,1060.43 2160.14,1045.17 ccw(c2164.39,1045.17) 2168.64,1045.17 2168.64,1060.43 cw(c2172.89,1060.43) 2177.14,1060.43 2177.14,1045.17 ccw(c2181.39,1045.17) 2185.64,1045.17 2185.64,1060.43 cw(c2189.89,1060.43) 2194.14,1060.43 2194.14,1045.17 ccw(c2198.39,1045.17) 2202.64,1045.17 2202.64,1060.43 cw(c2206.89,1060.43) 2211.14,1060.43 2211.14,1045.17 ccw(c2215.39,1045.17) 2219.64,1045.17 2219.64,1060.43 cw(c2223.89,1060.43) 2228.14,1060.43 2228.14,1045.17 ccw(c2232.39,1045.17) 2236.64,1045.17 2236.64,1060.43 cw(c2240.89,1060.43) 2245.14,1060.43 2245.14,1045.17 ccw(c2249.39,1045.17) 2253.64,1045.17 2253.64,1060.43 cw(c2257.89,1060.43) 2262.14,1060.43 2262.14,1045.17 ccw(c2266.39,1045.17) 2270.64,1045.17 2270.64,1060.43 cw(c2274.89,1060.43) 2279.14,1060.43 2279.14,1045.17 ccw(c2283.39,1045.17) 2287.64,1045.17 2287.64,1060.43 cw(c2291.89,1060.43) 2296.14,1060.43 2296.14,1049.73 ccw(c2300.39,1049.73) 2304.64,1049.73 2304.64,1052.87 cw(c2308.89,1052.87) 2305.88,1055.88 2314.95,1064.95 2335.84,1085.84 2452.39,1085.84 U1.16
I2C_SCL: R9.1 U3.A4 U4.20 | length 1241.9
  Top Layer w3.5: v1(1920,1112.5) 1920,1116.35 1925.88,1122.22 U3.A4 U3.A4@1925,1138.69 ; R9.1 2148.6,1539.43 2262.5,1425.53 2262.5,1350 2330,1350 2460.47,1480.47 U4.20
  Bottom Layer w3.5: v1(1920,1112.5) 1920,1095 1930,1085 2180,1085 2264.5,1169.5 2264.5,1348.72 v1(2263.22,1350)
I2C_SDA: R8.1 U3.A3 U4.1 | length 1312.8
  Top Layer w3.5: U3.A3 1950.71,1138.35 1950.71,1111.79 v1(1952.5,1110) ; R8.1 2019.97,1545.58 2019.97,1517.53 2080.84,1456.66 2183.29,1456.66 2245,1394.95 2245,1326.57 2247.46,1324.11 2249.11,1324.11 v1(2245,1320) ; v1@2249.02,1324.02 2321.52,1324.02 2460,1462.5 2599.07,1462.5 U4.1
  Bottom Layer w3.5: v1(1952.5,1110) 1955,1110 1972.5,1092.5 2175,1092.5 2245,1162.5 v1(2245,1320)
IN_CLK: U1.8 U3.D5 | length 948
  Top Layer w3.5: U3.D5 1901.82,1210 1867.5,1210 1852.5,1225 1852.5,1270 1872.5,1290 2165,1290 2185,1270 2297.5,1270 2299.25,1270 ccw(c2299.25,1274.25) 2303.5,1274.25 2303.5,1276.48 cw(c2307.76,1276.48) 2307.76,1280.74 cw(c2307.76,1276.48) 2312.01,1276.48 2312.01,1263.34 ccw(c2316.26,1263.34) 2316.26,1259.09 ccw(c2316.26,1263.34) 2320.51,1263.34 2320.51,1276.48 cw(c2324.76,1276.48) 2324.76,1280.74 cw(c2324.76,1276.48) 2329.02,1276.48 2329.02,1263.34 ccw(c2333.27,1263.34) 2333.27,1259.09 ccw(c2333.27,1263.34) 2337.52,1263.34 2337.52,1276.48 cw(c2341.77,1276.48) 2341.77,1280.74 cw(c2341.77,1276.48) 2346.02,1276.48 2346.02,1263.34 ccw(c2350.28,1263.34) 2350.28,1259.09 ccw(c2350.28,1263.34) 2354.53,1263.34 2354.53,1276.48 cw(c2358.78,1276.48) 2358.78,1280.74 cw(c2358.78,1276.48) 2363.03,1276.48 2363.03,1263.34 ccw(c2367.28,1263.34) 2367.28,1259.09 ccw(c2367.28,1263.34) 2371.54,1263.34 2371.54,1276.48 cw(c2375.79,1276.48) 2375.79,1280.74 cw(c2375.79,1276.48) 2380.04,1276.48 2380.04,1263.34 ccw(c2384.29,1263.34) 2384.29,1259.09 ccw(c2384.29,1263.34) 2388.54,1263.34 2388.54,1276.31 cw(c2392.8,1276.31) 2392.8,1280.56 cw(c2392.8,1276.31) 2397.05,1276.31 2397.05,1274.25 ccw(c2401.3,1274.25) 2401.3,1270 2408.54,1270 2457.2,1270 U1.8
NetC2_1: C2.1 L1.1 U2.2 | length 582.9
  Top Layer w15: U2.2 1124.31,1387.54 1124.31,1358.19 1137.5,1345 1305.69,1345 1317.5,1356.81 1317.5,1419.16 1330.84,1432.5 1394.12,1432.5 1424.21,1462.59 L1.1 1424.21,1516.77 1389.39,1551.59 1340.81,1551.59 C2.1
NetC2_2: C2.2 U2.4 | length 138
  Top Layer w15: U2.4 1157.4,1506.02 1161.71,1510.33 1177.83,1510.33 1204.41,1536.91 1252.38,1536.91 1262.6,1547.13 C2.2
NetC13_1: C13.1 U3.A1 | length 84.9
  Top Layer w10: U3.A1 1996.74,1055.85 C13.1
NetC14_1: C14.1 U3.D4 | length 65
  Top Layer w10: C14.1 1907.87,1260.1 1920.59,1247.38 1920.59,1227.38 1925.88,1222.09 U3.D4
NetC15_1: C15.1 U3.A2 | length 117.1
  Top Layer w3.5: 1972.5,1120 1972.5,1138.94 U3.A2
  Top Layer w10: C15.1 1942.5,1062.87 1973.12,1093.5 U3.A2
NetC19_2: C19.2 U5.8 Y1.1 | length 271.7
  Top Layer w12: Y1.1 1259.9,1171.54 C19.2 1259.9,1114.63 1240,1094.72 U5.8
NetC20_1: C20.1 U5.7 Y1.2 | length 255.3
  Top Layer w12: U5.7 1290,1059.31 1323.38,1092.69 1323.38,1110.78 C20.1 1335.1,1229.6 1361.06,1255.57 Y1.2
NetR1_1: R1.1 U2.5 | length 78.6
  Top Layer w15: U2.5 1124.31,1502.46 1124.31,1524.29 1154.45,1554.43 R1.1
NetR2_2: R2.2 R3.1 U2.6 | length 249.5
  Top Layer w12: U2.6 1082.6,1472.4 1097.5,1457.5 1170,1457.5 1186.98,1474.48 1215.03,1474.48 1227.5,1486.95 1271.1,1486.95 R3.1@1283.05,1475
NetR3_2: R3.2 R5.1 | length 119.8
  Top Layer w12: R5.1 1295.75,1402.7 1295.75,1426.01 1329.47,1459.73 1340.15,1459.73 1351.95,1471.53 R3.2@1351.95,1475
NOTIFY: U1.27 U4.18 | length 632.2
  Top Layer w8: v1(2530,1500) 2530,1507.81 2542.03,1519.84 U4.18 ; U1.27 2669.02,1123.48 v1(2680,1112.5)
  Bottom Layer w8: v1(2530,1500) 2530,1480 2565,1445 2597.5,1445 2620,1422.5 2620,1377.5 2660,1337.5 2660,1277.5 2715,1222.5 2715,1117.5 2710,1112.5 v1(2680,1112.5)
PCLK: U1.5 U3.C5 | length 948.1
  Top Layer w3.5: U3.C5 1901.57,1187.5 1880.1,1187.5 1845.5,1222.1 1845.5,1272.9 1871.11,1298.51 2188.49,1298.51 2194.5,1292.5 2205.26,1292.5 2215.51,1292.5 cw(c2215.51,1288.25) 2219.76,1288.25 2219.76,1283.45 ccw(c2224.01,1283.45) 2228.26,1283.45 2228.26,1293.73 cw(c2232.51,1293.73) 2236.76,1293.73 2236.76,1283.45 ccw(c2241.01,1283.45) 2245.26,1283.45 2245.26,1292.75 cw(c2249.51,1292.75) 2253.76,1292.75 2253.76,1288.25 ccw(c2258.01,1288.25) 2262.26,1288.25 cw(c2266.51,1288.25) 2266.51,1292.5 2296.31,1292.5 2312.25,1292.5 2318.26,1298.51 2534.96,1298.51 2538.76,1294.71 U1.5
TCK: P2.3 R7.2 U1.30 | length 455.6
  Top Layer w10: U1.30 2686.92,1182.54 2777.5,1091.96 2777.5,960 2760,942.5 R7.2@2760,898.05 ; R7.2 R7.2@2760,898.05 ; P2.3 2761.95,900 R7.2@2760,898.05
TDI: P2.2 U1.32 | length 340.5
  Top Layer w10: U1.32 2705.59,1221.91 2715.91,1211.59 2715.91,1176.59 2796,1096.5 2796,1059 2840.94,1014.06 P2.2
TDO: P2.1 U1.1 | length 327.9
  Top Layer w10: U1.1 2625,1240 2775,1240 2840.94,1174.06 P2.1
TMS: P2.4 U1.29 | length 545.8
  Top Layer w10: U1.29 2684.65,1162.85 2755,1092.5 2755,972.5 2725,942.5 2725,827.5 2752.5,800 P2.4
UART_RX: U1.28 U5.2 | length 1511
  Top Layer w8: U5.2 1540,982.5 1612.5,910 2637.5,910 2732.5,1005 2732.5,1087.5 2676.83,1143.17 U1.28
UART_TX: U1.21 U5.3 | length 1248.6
  Top Layer w8: U5.3 1490,1060 1522.81,1092.81 1752.19,1092.81 1880,965 2302.5,965 2327.5,940 2397.5,940 2445,987.5 2540,987.5 2558.44,1005.94 U1.21
VSYNC: U1.14 U3.C1 | length 941.2
  Top Layer w3.5: U3.C1 2018.19,1186.81 2040,1165 2040,1110 2052.5,1097.5 2112.5,1097.5 2116.56,1093.44 2118.31,1091.69 ccw(c2122.19,1097.82) 2126.82,1092.23 cw(c2131.07,1092.23) 2135.32,1092.23 2135.32,1077.99 ccw(c2139.57,1077.99) 2143.82,1077.99 2143.82,1092.23 cw(c2148.07,1092.23) 2152.32,1092.23 2152.32,1077.99 ccw(c2156.57,1077.99) 2160.82,1077.99 2160.82,1092.23 cw(c2165.07,1092.23) 2169.32,1092.23 2169.32,1077.99 ccw(c2173.57,1077.99) 2177.82,1077.99 2177.82,1092.23 cw(c2182.07,1092.23) 2186.32,1092.23 2186.32,1077.99 ccw(c2190.57,1077.99) 2194.82,1077.99 2194.82,1092.23 cw(c2199.07,1092.23) 2203.32,1092.23 2203.32,1077.99 ccw(c2207.57,1077.99) 2211.82,1077.99 2211.82,1092.23 cw(c2216.07,1092.23) 2220.32,1092.23 2220.32,1077.99 ccw(c2224.57,1077.99) 2228.82,1077.99 2228.82,1092.23 cw(c2233.07,1092.23) 2237.32,1092.23 2237.32,1077.99 ccw(c2241.57,1077.99) 2245.82,1077.99 2245.82,1092.23 cw(c2250.07,1092.23) 2254.32,1092.23 2254.32,1077.99 ccw(c2258.57,1077.99) 2262.82,1077.99 2262.82,1092.23 cw(c2267.07,1092.23) 2271.32,1092.23 2271.32,1077.99 ccw(c2275.57,1077.99) 2279.82,1077.99 2279.82,1092.23 cw(c2284.07,1092.23) 2288.32,1092.23 2288.32,1077.99 ccw(c2292.57,1077.99) 2296.82,1077.99 2296.82,1092.23 cw(c2301.07,1092.23) 2305.32,1092.23 2305.32,1086.75 ccw(c2309.57,1086.75) 2309.57,1082.5 2315,1082.5 2322.12,1089.62 2330,1097.5 2387.5,1097.5 2413.48,1123.48 U1.14
pads on no net: J1.4 J1.MH1 J1.MH2 U1.23 U1.25 U1.26 U4.2 U4.7 U4.8 U4.9 U4.10 U4.11 U4.13 U4.14 U4.15 U4.16 U4.17 U4.19 U5.9 U5.10 U5.11 U5.12 U5.13 U5.14 U5.15
copper on no net:
  other v3: 1555.5,1175.5 2342.5,1175.5

## Polygon pours and split planes (outlines as drawn)
GND on Layer 1 "NONET_L02_P-001" (solid, remove dead copper, pour order 2): 2825,1600 cw(c2825,1500) 2925,1500 2925,850 cw(c2825,850) 2825,750 1080,750 cw(c1080,850) 980,850 980,1500 cw(c1080,1500) 1080,1600
2V8 on Layer 2 "NONET_L02_P-001" (solid, remove dead copper, pour order 3): 2825,1600 cw(c2825,1500) 2925,1500 2925,850 cw(c2825,850) 2825,750 1075,750 cw(c1075,850) 975,850 975,1500 cw(c1075,1500) 1075,1600
GND on Bottom Layer "NONET_L02_P-001" (solid, remove dead copper, pour order 4): 2825,1600 cw(c2825,1500) 2925,1500 2925,850 cw(c2825,850) 2825,750 1075,750 cw(c1075,850) 975,850 975,1500 cw(c1075,1500) 1075,1600
GND on Top Layer "NONET_L02_P-001" (solid, remove dead copper, pour order 1): 2825,1600 cw(c2825,1500) 2925,1500 2925,850 cw(c2825,850) 2825,750 1075,750 cw(c1075,850) 975,850 975,1500 cw(c1075,1500) 1075,1600

## Keep-outs
Keep-Out Layer:
  lines w10: 975,850 ccw(c1075,850) 1004.29,779.29 ccw(c1075,850) 1075,750 1860,750 2700,750 2822.57,750 ccw(c2822.57,852.43) 2895,780 ccw(c2822.57,852.43) 2925,852.43 2925,910 2925,1497.57 ccw(c2822.57,1497.57) 2895,1570 ccw(c2822.57,1497.57) 2822.57,1600 2700,1600 1865,1600 1075,1600 ccw(c1075,1500) 1004.29,1570.71 ccw(c1075,1500) 975,1500 975,1175 975,850

## Other copper
Top Layer:
  text "1" at 1850,790 h30
Layer 1:
  text "2" at 1875,790 h30
Layer 2:
  text "3" at 1907.5,790 h30
Bottom Layer:
  text "4" at 1942.5,790 h30

## Silkscreen, mask and mechanical layers (free items; w line width, h text height)
Top Overlay:
  circle w10: c1950,1175 r5

## Text inside footprints (layer, text, board x,y; h text height)
C21: Top Overlay "+" at 2492.58,1475.32 h39.37
J1: Mechanical 2 "PCB Edge" at 949.82,1054.74 h16 r270